# Altium PCB H11R0.PcbDoc (part 2 of 2)
Units mm, origin at the board's own origin, x right, y up, seen from the top; angles counter-clockwise.
Board outline 60 x 34.64 mm, 2 copper layers (Top Layer, Bottom Layer); 46 components, 24 nets, 121 pads, 28 vias.
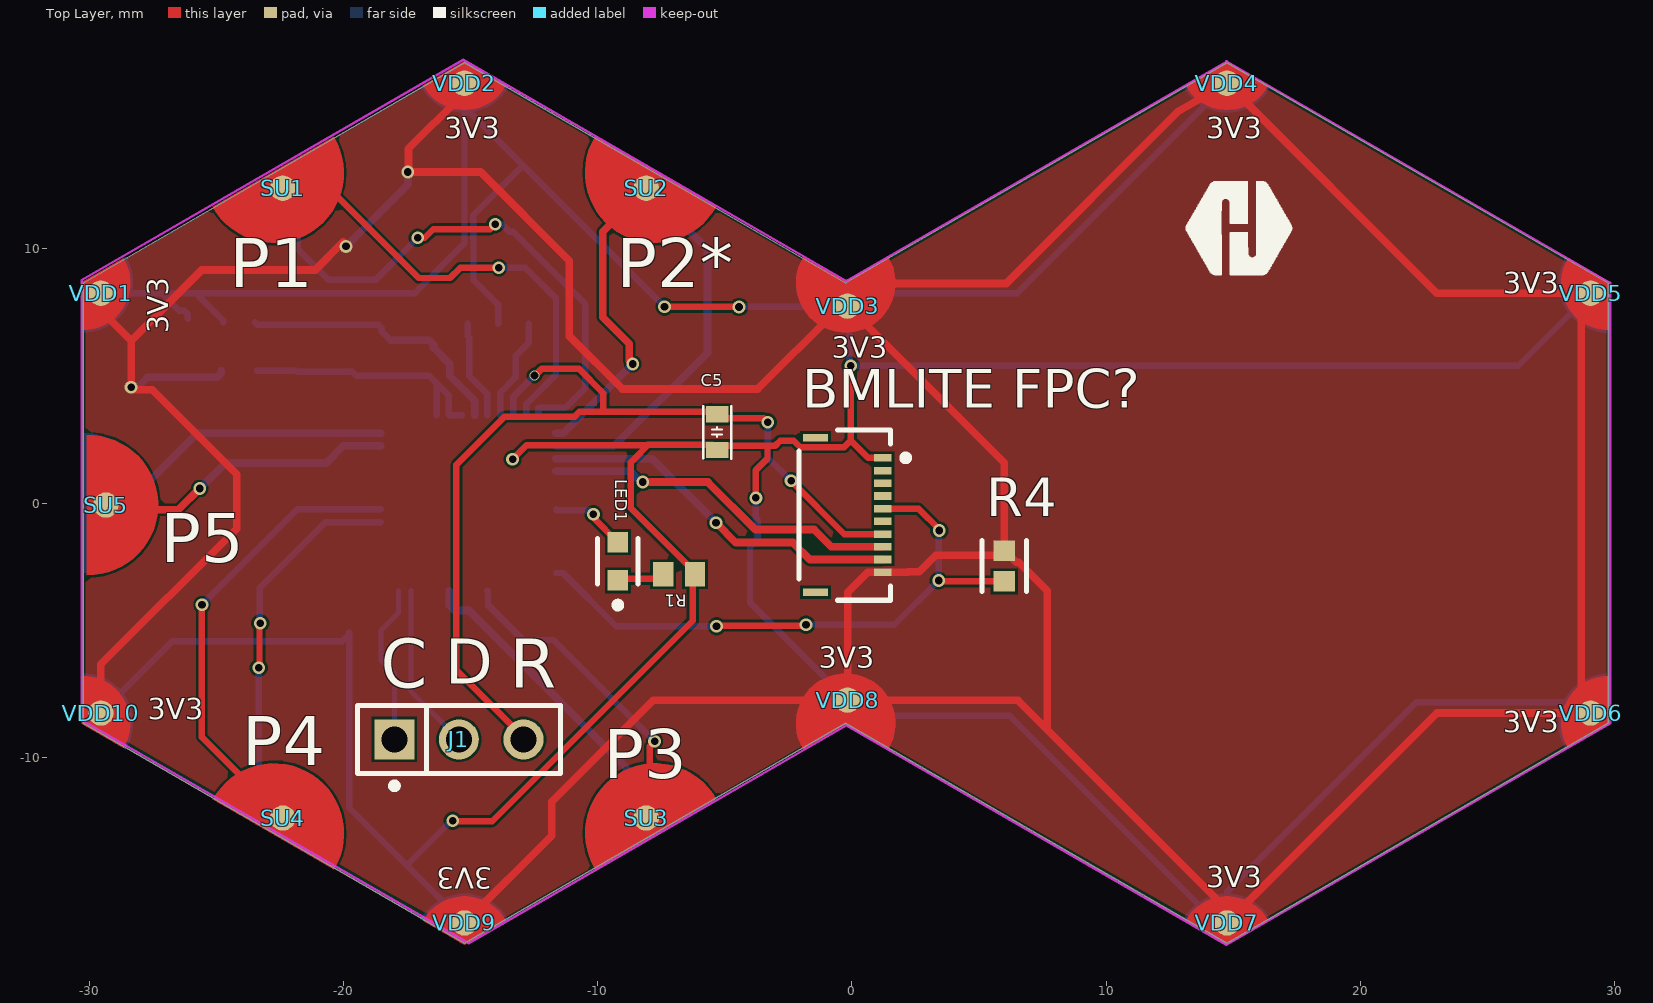
[diagram p0: Top Layer view]

## Part data (continued)
X1: "Ceramic Resonator 8MHz ±0.5% (Tol) ±0.2% (Stability) 10pF 40Ohm 3-Pin CSMD T/R", Case Code (Imperial)=1206, Case Code (Metric)=3216, Frequency=8MHz, Frequency Stability=0.2%, Frequency Tolerance=0.5%, Load Capacitance=10pF, Manufacturer=Murata, Max Operating Temperature=125°C, Min Operating Temperature=-40°C, Package Quantity=1, Case/Package=1206, Category=Capacitors, Contact Plating=Gold, Height=0.031inch, Impedance=40R, Length=3.2mm, Library=Hexabitz, Manufacturer Part Number=CSTCE8M00G52Z-R0, Mounting Technology="Surface Mount", Packaging="Tape and Reel", Pins=3, RoHS Compliant=Yes, Self Resonant Frequency=8MHz, Series=CERALOCK®, Termination=SMD/SMT, Tolerance=0.5%, Width=1.3mm

## Via types
v1: diameter 0.5, hole 0.3, Top Layer to Bottom Layer, tented both sides, 27 vias
v2: diameter 0.4, hole 0.3, Top Layer to Bottom Layer, tented both sides, 1 vias

## Nets (pads, with @x,y where several pads share a name; then routed paths per layer and width w, separated by ;. In a path a pad name is that pad's centre, name@x,y a point inside that pad or via, vN(x,y) a via of type N, cw(c..) or ccw(c..) an arc to the next point about the centre after c; other vN are vias at no path point)
CLK_BOOT: J1.1 R3.1 U1.36 | length 6.3
  Bottom Layer w0.2: R3.1 -18.527,-6.18 -17.998,-6.709 J1.1 ; R3.1@-18.527,-5.005 -17.838,-4.316 U1.36
CS_N: "BMLITE FPC?.5" R4.1 U1.24 | length 23.8
  Top Layer w0.254: v1(-5.323,-4.847) -5.293,-4.818 -1.834,-4.818 v1(-1.804,-4.788) ; 1.219,-0.221 2.627,-0.221 3.434,-1.029 v1(3.434,-1.077) ; v1(3.414,-3.047) 3.447,-3.08 R4.1
  Bottom Layer w0.254: U1.24 -11.363,-2.75 -9.265,-4.847 v1(-5.323,-4.847) ; v1(-1.804,-4.788) 1.673,-4.788 v1(3.414,-3.047) 3.424,-3.037 3.424,-1.087 v1(3.434,-1.077)
DATA: J1.2 U1.35 | length 6.6
  Bottom Layer w0.2: U1.35 -17.338,-7.421 J1.2
GND: "BMLITE FPC?.1" C5.1 D1.1 GND1.Pwr_D GND2.Pwr_D GND3.Pwr_D GND4.Pwr_D GND5.Pwr_D GND6.Pwr_D GND7.Pwr_D GND8.Pwr_D GND9.Pwr_D GND10.Pwr_D R1.1 R2.1 R3.2 U1.49 X1.P$2 | length 217.4
  Top Layer w0.254: v1(-15.703,-12.502) -15.686,-12.519 -14.151,-12.519 -6.265,-4.633 -6.265,-2.893 R1.1 -6.172,-2.725 -8.704,-0.193 -8.704,1.601 -8.555,1.75 -8.032,2.273 -12.801,2.273 v1(-13.349,1.726) ; -8.032,2.288 -5.51,2.288 -5.499,2.288 -5.345,2.135 C5.1 ; v1(-7.369,7.721) -7.367,7.719 -4.441,7.719 v1(-4.438,7.717) ; C5.1@-5.303,2.178 -5.217,2.263 -3.319,2.263 ; v1(-3.774,0.205) -3.774,1.303 -3.319,1.758 -3.319,2.263 ; -0.05,2.449 -0.307,2.192 -2.025,2.192 -2.282,2.449 -2.822,2.449 -3.007,2.263 -3.319,2.263 ; -0.048,2.449 -0.048,2.462 ; v1(-0.048,5.405) -0.048,2.462 ; 1.219,1.779 0.635,1.779 -0.048,2.462
  Bottom Layer w0.254: GND10.Pwr_D -26.715,-5.428 -20.05,-5.428 -19.777,-5.155 R3.2 -19.777,-11.983 -17.508,-14.252 ; GND1.Pwr_D -27.151,8.26 ; D1.1 -26.137,7.446 -26.26,7.569 -26.46,7.569 -27.151,8.26 ; R2.1 -24.73,7.187 -25.803,8.26 ; v1(-15.703,-12.502) -15.759,-12.502 -17.508,-14.252 ; GND9.Pwr_D -17.508,-14.252 ; GND2.Pwr_D -15.24,15.592 ; X1.P$2 -13.919,7.8 -14.886,8.767 -14.886,10.375 -14.897,10.386 -14.897,11.327 -12.995,13.229 -12.877,13.229 ; v1(-7.369,7.721) -12.877,13.229 ; v1(-4.438,7.717) -4.421,7.734 -0.186,7.734 GND3.Pwr_D ; v1(-3.774,0.205) -3.774,-0.605 -3.693,-0.685 -3.693,-1.428 -4.007,-1.742 -4.007,-3.913 GND8.Pwr_D 0.445,-8.364 6.208,-8.364 14.221,-16.377 14.617,-16.377 GND7.Pwr_D 14.76,-15.286 22.203,-7.843 28.548,-7.843 28.966,-8.26 GND6.Pwr_D ; GND4.Pwr_D 6.5,8.26 2.807,8.26 0.354,8.26 -0.154,7.752 GND3.Pwr_D ; GND5.Pwr_D 26.215,5.405 v1(-0.048,5.405) -0.108,5.465 -0.108,7.692 GND3.Pwr_D ; -27.151,8.26 -25.803,8.26 ; -25.803,8.26 -17.191,8.26 -17.042,8.409 -17.042,8.426 -15.24,10.228 -15.24,15.592 ; -15.24,15.592 -12.877,13.229
MCU_UART6_RX: "BMLITE FPC?.8" U1.16 | length 14.1
  Top Layer w0.3: v1(-8.227,0.829) -5.66,0.829 -3.79,-1.041 -1.484,-1.041 -0.804,-1.721 1.219,-1.721
  Bottom Layer w0.3: U1.16 -8.702,1.25 -8.281,0.829 v1(-8.227,0.829)
MCU_UART6_TX: "BMLITE FPC?.9" U1.15 | length 14.5
  Top Layer w0.3: v1(-5.344,-0.769) -4.561,-1.551 -2.316,-1.551 -1.646,-2.221 1.219,-2.221
  Bottom Layer w0.3: U1.15 -7.863,1.75 v1(-5.344,-0.769)
NetLED1_1: LED1.1 R1.2 | length 1.9
  Top Layer w0.254: LED1.1 -9.149,-2.979 -7.601,-2.979 R1.2
NetLED1_2: LED1.2 U1.19 | length 3
  Top Layer w0.254: v1(-10.167,-0.443) -10.167,-0.578 LED1.2
  Bottom Layer w0.254: U1.19 -11.615,-0.273 -10.337,-0.273 v1(-10.167,-0.443)
NetU1_8: U1.8 X1.P$3 | length 3.9
  Bottom Layer w0.254: X1.P$3 -15.119,6.593 -15.114,6.589 -15.051,6.526 -15.051,4.999 -14.338,4.285 U1.8
NetU1_9: U1.9 X1.P$1 | length 4.1
  Bottom Layer w0.254: U1.9 -13.835,3.453 -13.835,4.343 -13.219,4.958 -13.219,5.8 -12.719,6.3 X1.P$1
NRST: "BMLITE FPC?.7" C5.2 J1.3 U1.10 | length 38.3
  Top Layer w0.254: J1.3 -12.918,-9.211 -15.556,-6.572 -15.556,1.506 -13.658,3.405 -10.907,3.405 -10.723,3.589 -9.778,3.589 ; v2(-12.486,5.021) -12.467,5.021 -12.193,5.294 -10.75,5.294 -9.778,4.323 -9.778,3.589 ; v1(-3.304,3.185) -3.458,3.339 -5.149,3.339 C5.2 -5.505,3.694 -5.63,3.694 -5.735,3.589 -9.778,3.589 ; v1(-2.391,0.876) -0.294,-1.221 1.219,-1.221
  Bottom Layer w0.254: U1.10 -13.315,3.473 -13.315,4.192 v2(-12.486,5.021) ; v1(-3.304,3.185) -3.304,1.789 v1(-2.391,0.876)
UART1_RX: SD3.UART_D U1.32 | length 12.5
  Bottom Layer w0.3: U1.32 -15.838,-3.813 -15.838,-4.02 -15.633,-4.225 -15.063,-4.225 -8.09,-11.198 SD3.UART_D
UART1_TX: SU3.UART_U U1.29 | length 12.5
  Top Layer w0.254: SU3.UART_U -7.95,-12.25 -7.95,-9.565 v1(-7.76,-9.375)
  Bottom Layer w0.254: U1.29 -14.315,-3.473 -14.315,-4.01 -12.938,-5.387 -11.748,-5.387 v1(-7.76,-9.375)
UART2_RX: SD2.UART_D U1.14 | length 15
  Bottom Layer w0.3: U1.14 -9.344,2.25 -5.677,5.916 -5.677,9.978 SD2.UART_D
UART2_TX: SU2.UART_U U1.13 | length 12.2
  Top Layer w0.3: v1(-8.625,5.475) -8.761,5.61 -8.761,6.275 -9.799,7.313 -9.799,10.681 SU2.UART_U
  Bottom Layer w0.3: U1.13 -11.351,2.75 v1(-8.625,5.475)
UART3_RX: SD5.UART_D U1.48 | length 12.2
  Bottom Layer w0.3: SD5.UART_D -28.506,0 -25.756,2.75 U1.48
UART3_TX: SU5.UART_U U1.47 | length 11.9
  Top Layer w0.3: SU5.UART_U -27.511,-0.075 -27.324,-0.263 -26.496,-0.263 v1(-25.66,0.574)
  Bottom Layer w0.3: v1(-25.66,0.574) -24.657,1.576 -20.685,1.576 -20.011,2.25 U1.47
UART4_RX: SD1.UART_D U1.12 | length 22.4
  Top Layer w0.254: v1(-17.081,10.438) -16.806,10.438 -16.469,10.776 -14.229,10.776 v1(-14.035,10.97)
  Bottom Layer w0.254: SD1.UART_D -22.39,11.578 -21.798,10.985 -21.798,9.996 -20.581,8.779 -18.74,8.779 v1(-17.081,10.438) ; v1(-14.035,10.97) -13.76,10.97 -13.46,10.67 -13.327,10.67 -10.489,7.832 -10.489,4.528 -11.269,3.748 -12.315,3.748 -12.338,3.725 U1.12
UART4_TX: SU1.UART_U U1.11 | length 18
  Top Layer w0.254: SU1.UART_U -20.575,12.39 -17.042,8.857 -15.808,8.857 -15.4,9.265 v1(-13.891,9.265)
  Bottom Layer w0.254: v1(-13.891,9.265) -12.853,9.265 -11.64,8.052 -11.64,5.064 -12.815,3.889 -12.815,3.473 U1.11
UART5_RX: SD4.UART_D U1.41 | length 15.3
  Top Layer w0.254: v1(-23.334,-6.483) -23.306,-6.455 -23.306,-4.751 v1(-23.278,-4.724)
  Bottom Layer w0.254: v1(-23.334,-6.483) -23.344,-6.493 -23.344,-11.437 SD4.UART_D ; v1(-23.278,-4.724) -23.289,-4.712 -23.289,-3.329 -20.71,-0.75 U1.41
UART5_TX: SU4.UART_U U1.42 | length 18.3
  Top Layer w0.254: v1(-25.569,-3.997) -25.576,-4.005 -25.576,-9.204 SU4.UART_U
  Bottom Layer w0.254: v1(-25.569,-3.997) -21.821,-0.25 U1.42
VDD: "BMLITE FPC?.10" D1.2 FB1.1 R4.2 VDD1.Pwr_U VDD2.Pwr_U VDD3.Pwr_U VDD4.Pwr_U VDD5.Pwr_U VDD6.Pwr_U VDD7.Pwr_U VDD8.Pwr_U VDD9.Pwr_U VDD10.Pwr_U | length 207.9
  Top Layer w0.3: VDD10.Pwr_U -29.547,-6.346 -24.207,-1.006 -24.207,1.128 -27.532,4.453 -28.249,4.453 v1(-28.358,4.561) -28.358,6.392 ; VDD1.Pwr_U -29.514,8.228 -29.514,7.549 -28.358,6.392 ; v1(-19.901,10.099) -20.004,10.202 -20.004,10.284 -21.118,9.171 -25.579,9.171 -28.358,6.392 ; VDD9.Pwr_U -11.805,-13.085 -11.805,-11.749 -7.808,-7.752 VDD8.Pwr_U ; VDD2.Pwr_U -15.374,16.386 -15.374,16.007 -17.445,13.936 -17.445,13.049 v1(-17.468,13.027) -14.609,13.027 -11.117,9.535 -11.117,6.574 -9.033,4.49 -3.699,4.49 -0.674,7.515 -0.594,7.515 -0.357,7.752 VDD3.Pwr_U ; VDD8.Pwr_U 6.536,-7.752 7.695,-8.911 ; VDD8.Pwr_U -0.168,-3.51 0.62,-2.721 1.219,-2.721 2.193,-2.721 2.211,-2.703 2.65,-2.703 3.302,-2.051 5.996,-2.051 R4.2 ; VDD3.Pwr_U 0.721,8.641 6.072,8.641 12.848,15.416 VDD4.Pwr_U 23.02,8.26 VDD5.Pwr_U 29.07,8.099 28.705,7.734 28.705,-7.734 29.07,-8.099 VDD6.Pwr_U 23.02,-8.26 VDD7.Pwr_U 14.66,-16.42 14.66,-15.876 7.695,-8.911 ; VDD3.Pwr_U 5.996,1.589 R4.2 ; R4.2 6.022,-1.878 6.095,-1.952 6.471,-2.327 6.57,-2.327 7.695,-3.452 7.695,-8.911
  Bottom Layer w0.3: v1(-28.358,4.561) -28.095,4.561 -27.711,4.946 -24.966,4.946 -24.805,5.107 FB1.1 ; v1(-19.901,10.099) -17.468,12.532 v1(-17.468,13.027)
VDDA: C1.2 C2.1 C3.2 C4.2 FB1.2 U1.4 U1.5 U1.6 | length 10.4
  Bottom Layer w0.254: FB1.2 -21.857,5.207 C4.2 C2.1 -19.496,5.006 C3.2 C1.2 ; C1.2@-16.629,5.006 C1.2@-16.338,4.714 ; U1.4 C1.2@-16.338,4.714 ; U1.6 U1.5 -15.861,3.473 -15.861,4.237 C1.2@-16.338,4.714
VSSA: C1.1 C2.2 C3.1 C4.1 R2.2 U1.7 | length 10.9
  Bottom Layer w0.254: R2.2 -23.391,7.023 C4.1 C2.2 -18.641,7.023 -18.492,6.874 -18.492,6.749 C3.1@-18.149,6.406
  Bottom Layer w0.3: C3.1@-18.149,6.406 -16.629,6.406 -16.459,6.236 -16.459,6.111 -15.822,5.473 -15.822,5.004 -14.838,4.02 U1.7
pads on no net: "BMLITE FPC?.2" "BMLITE FPC?.3" "BMLITE FPC?.4" "BMLITE FPC?.6" "BMLITE FPC?.MP1" "BMLITE FPC?.MP2" U1.1 U1.2 U1.3 U1.17 U1.18 U1.20 U1.21 U1.22 U1.23 U1.25 U1.26 U1.27 U1.28 U1.30 U1.31 U1.33 U1.34 U1.37 U1.38 U1.39 U1.40 U1.43 U1.44 U1.45 U1.46

## Polygon pours and split planes (outlines as drawn)
GND on Bottom Layer "GND_L02_P000" (solid, pour order 0): -15.286,17.44 -25.906,11.162 -30.24,8.805 -30.24,-8.66 -23.337,-12.645 -15.078,-17.158 -0.228,-8.746 7.845,-13.328 14.88,-17.32 29.836,-8.659 29.836,8.664 25.426,11.162 14.741,17.379 -0.207,8.661 -2.87,10.178 -15.286,17.44 -24.945,11.864 -30.296,8.774
VDD on Top Layer "VDD_L01_P004" (solid, pour order 4): -15.215,17.524 -25.835,11.245 -30.169,8.888 -30.169,-8.576 -23.266,-12.562 -15.006,-17.074 -0.156,-8.663 7.916,-13.244 14.951,-17.237 29.907,-8.576 29.907,8.747 25.497,11.245 14.813,17.462 -0.136,8.745 -2.799,10.261 -15.215,17.524 -24.874,11.947 -30.225,8.858

## Keep-outs
Keep-Out Layer:
  lines w0.1: -30.296,-8.534 -15.078,-17.32 -0.228,-8.746 14.729,-17.381 29.836,-8.659 29.836,8.664 14.741,17.379 -0.219,8.741 -15.286,17.44 -30.296,8.774 -30.296,-8.534

## Silkscreen, mask and mechanical layers (free items; w line width, h text height)
Top Overlay:
  drawing of 1337 lines, arcs and shapes, not listed
  text "3V3" at -16.027,14.351 h0.81
  text "3V3" at 13.945,14.351 h0.81
  text "P1" at -24.486,8.484 h1.93
  text "P2*" at -9.246,8.484 h1.93
  text "3V3" at 25.629,8.255 h0.81
  text "3V3" at -26.899,6.68 h0.81 r90
  text "3V3" at -0.787,5.715 h0.81
  text "P5" at -27.19,-2.327 h1.93
  text "3V3" at -1.295,-6.477 h0.81
  text "D" at -16.002,-7.112 h1.78
  text "C" at -18.542,-7.264 h1.93
  text "R" at -13.462,-7.264 h1.93
  text "3V3" at -27.711,-8.509 h0.81
  text "3V3" at 25.629,-9.017 h0.81
  text "P4" at -23.978,-10.312 h1.93
  text "P3" at -9.754,-10.82 h1.93
  text "3V3" at -14.148,-14.351 h0.81 r180
  text "3V3" at 13.945,-15.113 h0.81
Bottom Overlay:
  text "GND" at -16.027,15.113 h0.81 r180
  text "GND" at 13.945,15.113 h0.81 r180
  text "P1" at -18.034,10.516 h1.93
  text "H11R0" at 18.008,10.001 h1.78
  text "GND" at 27.508,8.255 h0.81
  text "P2*" at -4.138,7.942 h1.93
  text "GND" at -28.067,7.036 h0.81 r90
  text "GND" at -1.295,6.477 h0.81 r180
  text "P5" at -25.079,-2.224 h1.93
  text "GND" at -1.295,-5.715 h0.81 r180
  text "GND" at -25.324,-8.509 h0.81
  text "GND" at 27.508,-9.017 h0.81
  text "P4" at -20.93,-10.312 h1.93
  text "P3" at -10.77,-12.852 h1.93
  text "GND" at 13.945,-13.843 h0.81 r180
  text "GND" at -16.535,-14.351 h0.81 r180
Top Solder:
  drawing of 17 lines, arcs and shapes, not listed
Bottom Solder:
  drawing of 17 lines, arcs and shapes, not listed
Dimensions:
  lines w0.1: -0.078,-8.66 -15.078,-17.32 -30.078,-8.66 -30.078,8.66 -15.078,17.32 -0.078,8.66

## Text inside footprints (layer, text, board x,y; h text height)
C2: Mechanical 32 "2" at -19.66,6.769 h0.64 r270; Mechanical 32 "1" at -19.66,4.915 h0.64 r270; Mechanical 33 "C40" at -19.842,7.963 h0.64 r270
C4: Mechanical 32 "2" at -21.819,5.423 h0.64 r90; Mechanical 32 "1" at -21.819,7.277 h0.64 r90; Mechanical 33 "C40" at -21.636,4.229 h0.64 r90